# Altium PCB MainBoard_System_pcb.PcbDoc (part 3 of 3)
Units mm, origin at the board's own origin, x right, y up, seen from the top; angles counter-clockwise.
Board outline 57.35 x 57.35 mm, 2 copper layers (Top Layer, Bottom Layer); 82 components, 64 nets, 322 pads, 173 vias.
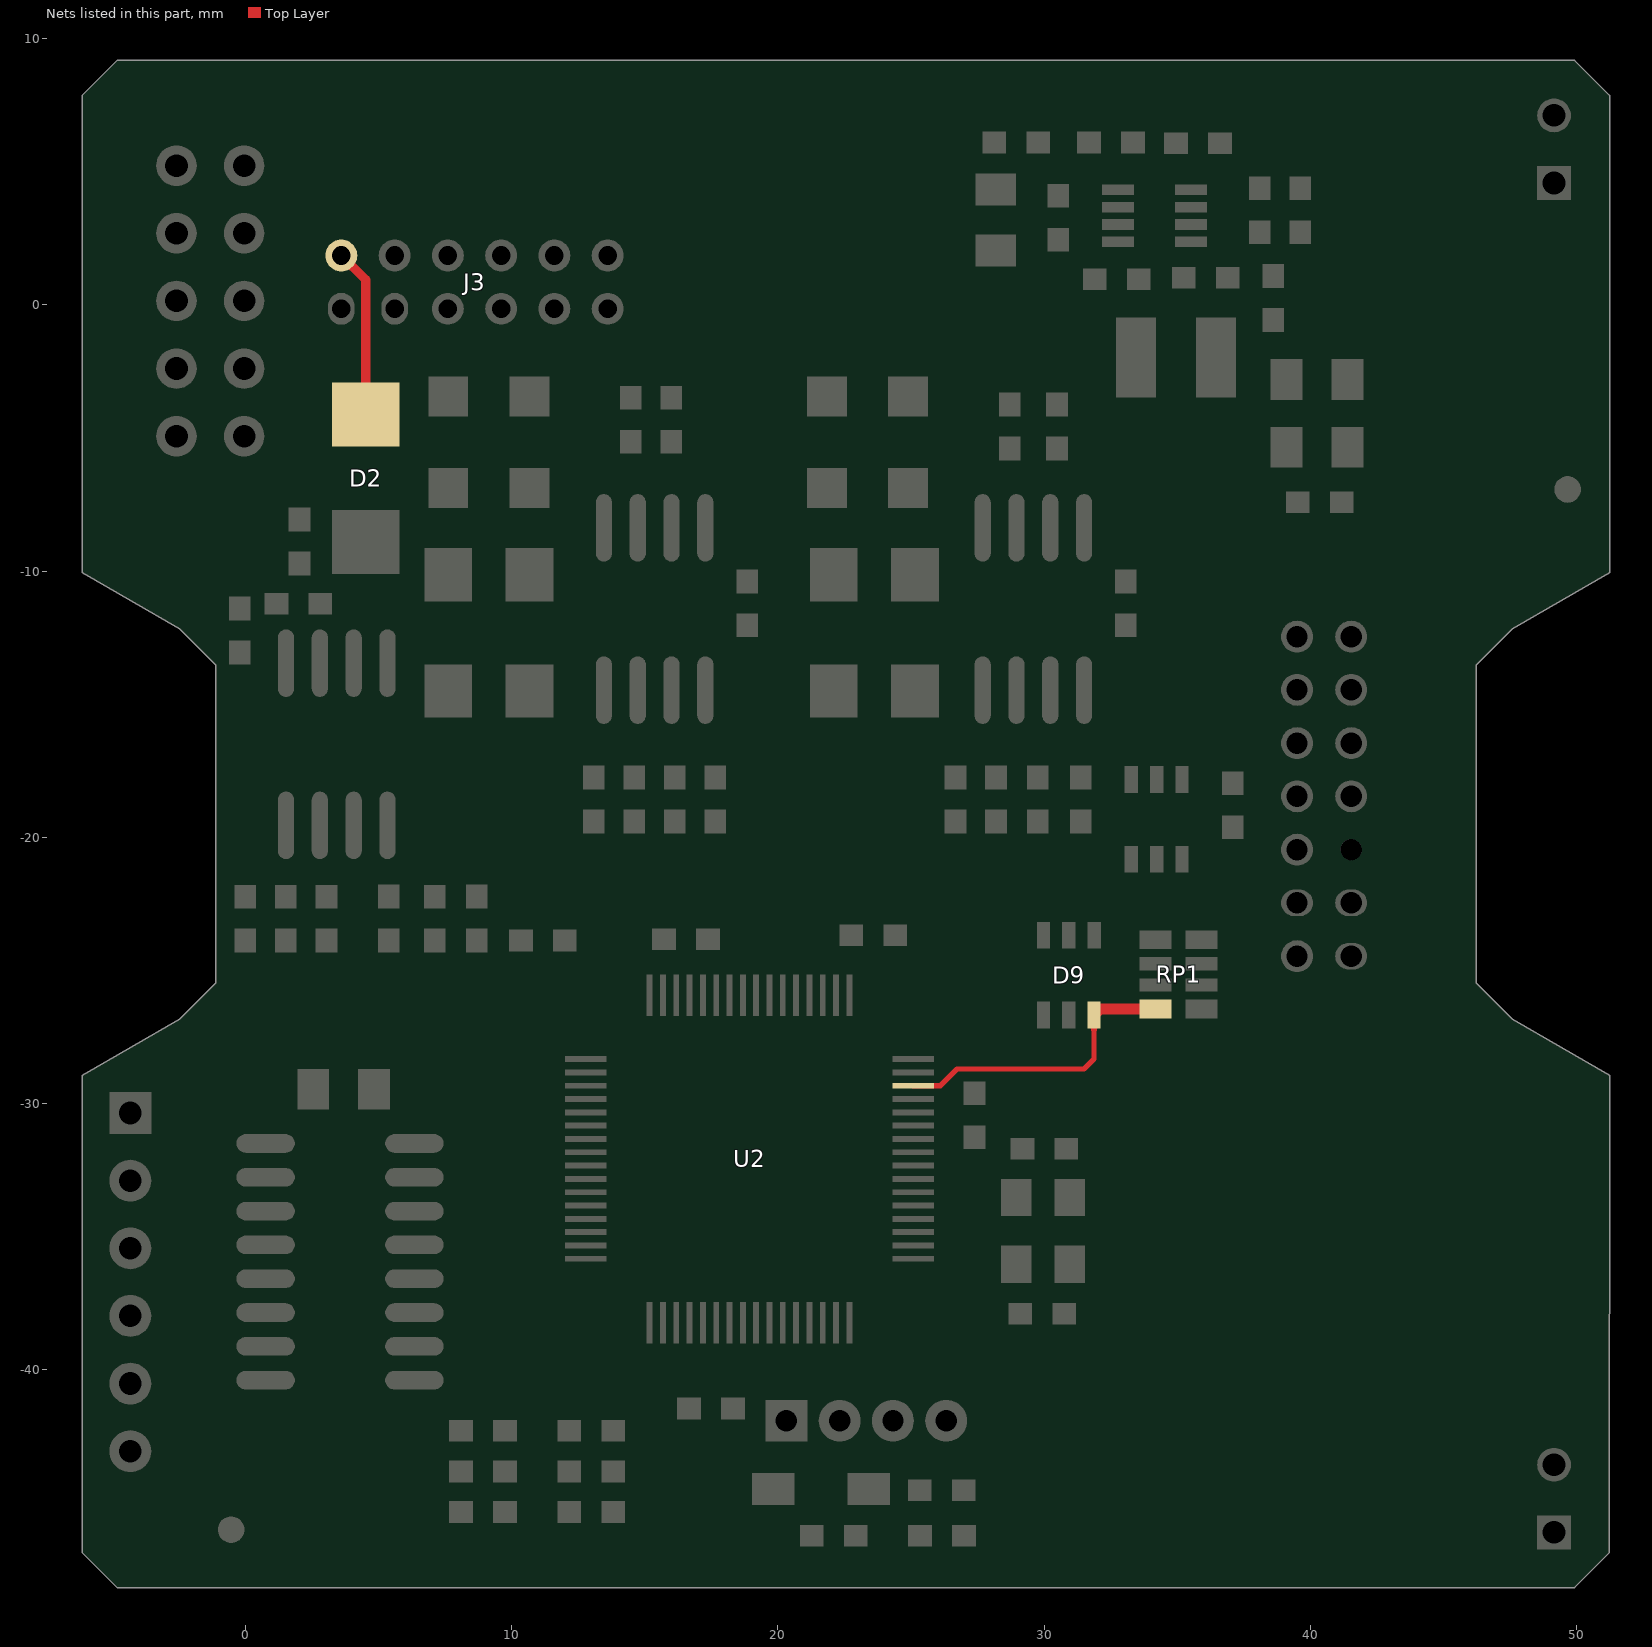
[diagram p3: the nets of this part, all layers, seen from the top]

## Via types
v1: diameter 0.7, hole 0.4, Top Layer to Bottom Layer, tented both sides, 173 vias

## Nets (pads, with @x,y where several pads share a name; then routed paths per layer and width w, separated by ;. In a path a pad name is that pad's centre, name@x,y a point inside that pad or via, vN(x,y) a via of type N, cw(c..) or ccw(c..) an arc to the next point about the centre after c; other vN are vias at no path point) (continued)
UART_EX_TX1: D9.3 RP1.4 U2.14 | length 12.4
  Top Layer w0.2: U2.14@25.085,-29.327 26.103,-29.327 26.728,-28.702 31.496,-28.702 31.872,-28.326 D9.3@31.872,-26.67 ; D9.3@31.766,-27.026 cw(c31.51,-27.282) 31.872,-27.282 cw(c32.234,-27.282) D9.3@31.978,-27.026
  Top Layer w0.4: D9.3@31.872,-26.67 32.096,-26.446 RP1.4@34.187,-26.446 ; RP1.4@33.831,-26.552 ccw(c33.575,-26.808) 33.575,-26.446 ccw(c33.575,-26.084) RP1.4@33.831,-26.34
VSP: D2.1 J3.1 | length 6.3
  Top Layer w0.35: J3.1@3.607,1.851 4.521,0.936 4.521,-2.286 D2.1@4.521,-4.115
pads on no net: D9.4 D10.1 D10.6 J2.3 J2.4 J2.7 J2.8 J3.3 J4.1 J4.2 J5.3 J5.4 J5.10 J6.1 J7.1 J7.2 U2.5 U2.6 U2.7 U2.8 U2.16 U2.17 U2.19 U2.20 U2.21 U2.25 U2.26 U2.27 U2.28 U2.31 U2.39 U2.40 U2.41 U2.42 U2.43 U2.44 U2.45 U2.46 U2.47 U2.48 U2.52 U2.53 U2.54 U2.57 U2.58 U2.59 U2.60 U2.61 U2.62 U2.63 U2.64 U5.7 U5.10

## Polygon pours and split planes (outlines as drawn)
GND on Bottom Layer "Top Layer-No Net" (hatched 90Degree grid 0.508 track 0.508, remove dead copper, pour order 1000): -5.969,-47.125 -4.939,-48.155 49.794,-48.155 51.109,-46.84 51.109,7.884 49.797,9.197 -4.939,9.197 -6.24,7.896 -6.24,-46.855
GND on Top Layer "Top Layer-No Net" (hatched 90Degree grid 0.508 track 0.508, remove dead copper, pour order 1001): -5.705,-47.249 -4.675,-48.279 50.058,-48.279 51.373,-46.964 51.373,7.76 50.061,9.073 -4.675,9.073 -5.976,7.773 -5.976,-46.979

## Keep-outs
Keep-Out Layer:
  lines w0.127: -6.118,7.877 -6.118,-10.059 -2.468,-12.166 -1.118,-13.516 -1.118,-14.504 -1.118,-24.493 -1.118,-25.481 -2.468,-26.831 -6.118,-28.939 -6.118,-46.874 -4.817,-48.174 ; -6.118,7.877 -4.817,9.177 49.919,9.177 51.234,7.862 ; -6.118,7.877 -6.118,7.877 ; -4.817,-48.174 49.919,-48.174 49.919,-48.172 51.231,-46.859 51.234,-28.939 47.584,-26.831 46.234,-25.481 46.234,-24.493 46.234,-14.504 46.234,-13.516 47.584,-12.166 51.234,-10.059 51.234,7.862 ; -4.817,-48.174 -4.817,-48.174 ; 51.234,7.862 51.234,7.862

## Other copper
Top Layer:
  pour cut-out: 33.02,-21.844 30.922,-21.844 30.922,-20.361 31.242,-20.041 31.384,-20.182 33.203,-20.182 33.203,-22.099 33.12,-22.182
  pour cut-out: 17.272,-41.275 19.685,-41.275 20.066,-41.656 20.066,-42.692 19.578,-43.18 17.907,-43.18 17.78,-43.307 17.272,-42.799
  pour cut-out: 24.384,-36.195 23.114,-37.465 23.114,-40.386 23.511,-39.989 24.638,-39.989 25.146,-39.481 25.146,-36.068 24.638,-36.068 24.638,-35.814
  pour cut-out: 20.574,-10.795 20.574,-13.589 21.336,-14.351 25.908,-14.351 26.289,-13.97 26.289,-10.922 20.889,-10.922 20.828,-10.861
  pour cut-out: 17.145,-9.271 18.542,-10.668 18.542,-11.557 17.272,-12.827 13.843,-12.827 12.446,-11.43 13.716,-10.16 13.716,-9.271
  pour cut-out: 6.096,-11.303 6.096,-15.113 6.35,-15.367 11.176,-15.367 11.684,-14.859 11.684,-11.557 11.938,-11.303
  pour cut-out: 6.35,-9.398 6.858,-9.906 11.557,-9.906 11.684,-9.779 11.684,-4.065 6.351,-4.065 6.35,-4.064
  pour cut-out: 20.574,-6.858 21.336,-7.62 24.15,-7.62 25.788,-5.981 25.788,-3.665 25.654,-3.531 20.726,-3.531 20.574,-3.683
  pour cut-out: 4.318,-0.508 7.607,-0.508 7.607,-1.791 6.858,-2.54 4.318,-2.54
  pour cut-out: 2.794,-5.207 2.794,-7.302 2.667,-7.429 2.857,-7.62 6.121,-7.62 6.121,-7.392 6.782,-6.731 6.541,-6.49 6.541,-5.715 3.302,-5.715
  pour cut-out: 5.08,-18.415 5.08,-16.51 5.159,-16.431 0.942,-16.431 0.942,-16.584 0.254,-17.272 0.254,-18.288 4.953,-18.288

## Silkscreen, mask and mechanical layers (free items; w line width, h text height)
Top Overlay:
  rectangle: 47.879,3.302 50.419,8.382
  rectangle: 47.879,-47.371 50.419,-42.291
  text "10515.0501_主板-V1.0" at 34.798,-37.338 h1.2
  text "20200914H1.2Sn" at 35.56,-39.243 h1.2
Bottom Overlay:
  lines w0.127: 47.913,3.616 48.213,3.316 50.113,3.316 50.413,3.616 50.413,5.516 50.113,5.816 48.213,5.816 47.913,5.516 ; 47.913,6.156 48.213,5.856 50.113,5.856 50.413,6.156 50.413,8.056 50.113,8.356 48.213,8.356 47.913,8.056 ; 48.838,4.241 48.838,4.891 ; 48.838,4.241 49.011,4.414 ; 48.838,4.241 49.488,4.241 ; 48.838,4.891 49.011,4.718 ; 48.838,4.891 49.488,4.891 ; 48.838,6.781 48.838,7.431 ; 48.838,6.781 49.011,6.954 ; 48.838,6.781 49.488,6.781 ; 48.838,7.431 49.011,7.258 ; 48.838,7.431 49.488,7.431 ; 49.011,4.414 49.011,4.718 ; 49.011,4.414 49.315,4.414 ; 49.011,4.718 49.315,4.718 ; 49.011,6.954 49.011,7.258 ; 49.011,6.954 49.315,6.954 ; 49.011,7.258 49.315,7.258 ; 49.315,4.414 49.488,4.241 ; 49.315,4.414 49.315,4.718 ; 49.315,4.718 49.488,4.891 ; 49.315,6.954 49.488,6.781 ; 49.315,6.954 49.315,7.258 ; 49.315,7.258 49.488,7.431 ; 49.488,4.241 49.488,4.891 ; 49.488,6.781 49.488,7.431